# Altium PCB DAP_board.PcbDoc
Units mil, origin at the board's own origin, x right, y up, seen from the top; angles counter-clockwise.
Board outline 770 x 680 mil, 2 copper layers (Top Layer, Bottom Layer); 6 components, 20 nets, 62 pads, 34 vias.
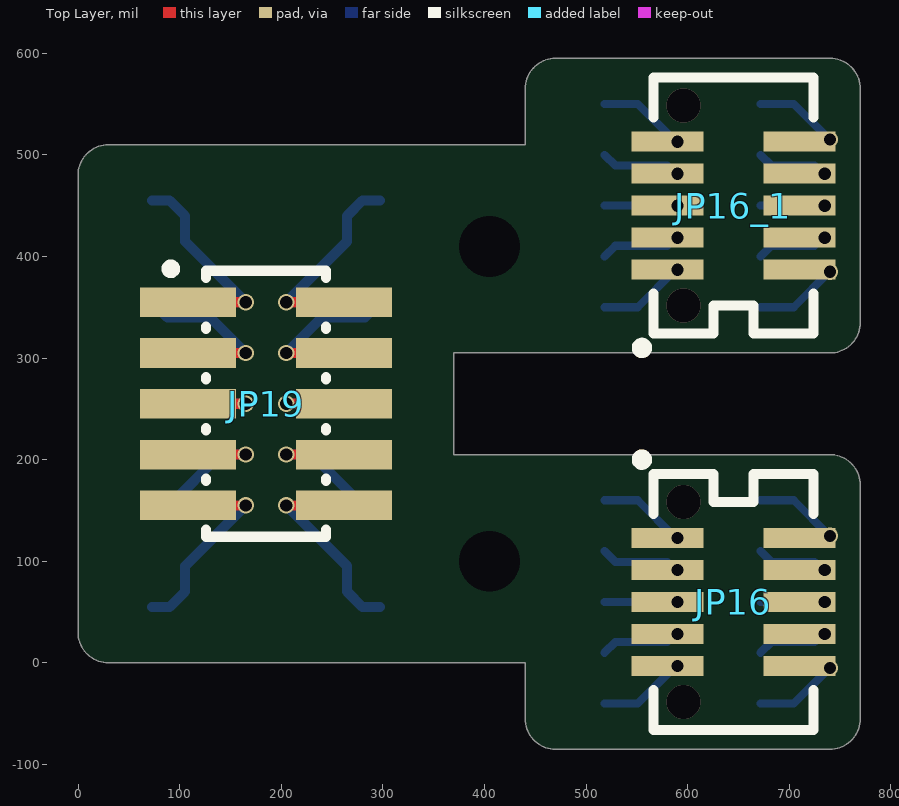
[diagram p0: Top Layer view]
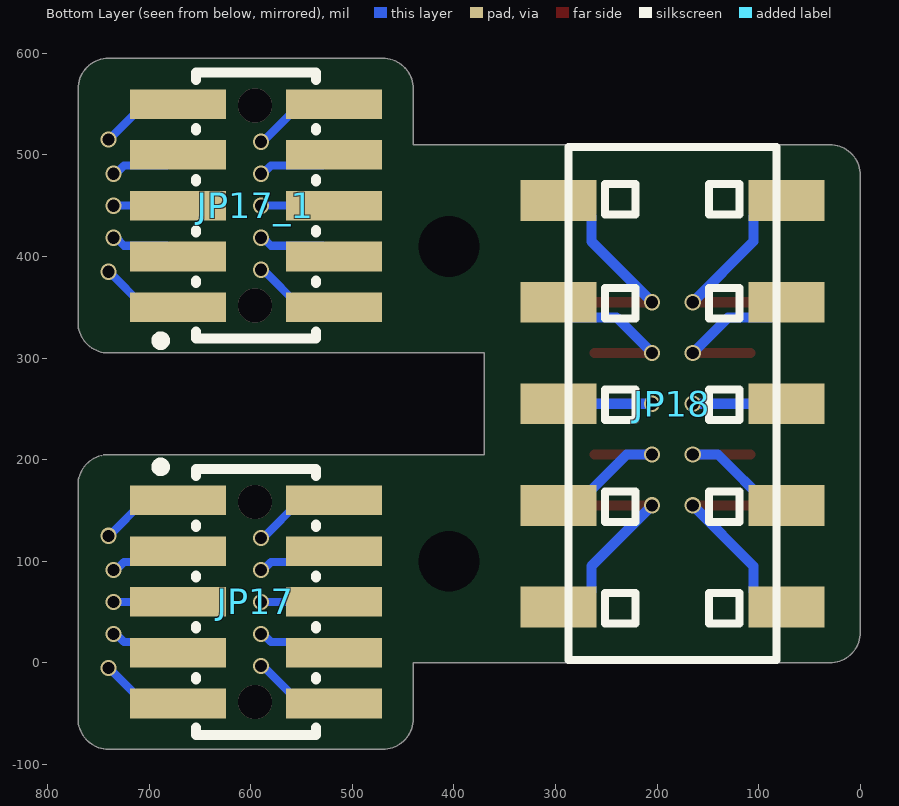
[diagram p1: Bottom Layer view, seen from below]

## Layer stack, top to bottom
Top Solder: solder mask 0.4, Solder Resist, Dk 3.5
Top Layer: signal copper 1.4
Dielectric 1: dielectric 12.6, FR-4, Dk 4.8
Bottom Layer: signal copper 1.4
Bottom Solder: solder mask 0.4, Solder Resist, Dk 3.5

## Board outline
30,0 cw(c30,30) 0,30 0,480 cw(c30,480) 30,510 440,510 440,565 cw(c470,565) 470,595 740,595 cw(c740,565) 770,565 770,335 cw(c740,335) 740,305 370,305 370,205 740,205 cw(c740,175) 770,175 770,-55 cw(c740,-55) 740,-85 470,-85 cw(c470,-55) 440,-55 440,0

## Design rules (kind name [scope] priority, off if disabled: settings)
Clearance [All] p1: gap=8 ignorepadtopadclearanceinfootprint=FALSE except(0: Arc-Hole Track-Hole SMDPad-Hole THPad-Hole Via-Hole Fill-Hole Poly-Hole Region-Hole Text-Hole)
PolygonConnect [All] p1: connectstyle=Relief reliefconductorwidth=10 reliefentries=4 polygonreliefangle="90 Angle" airgapwidth=10
RoutingVias [All] p1: holewidth=28 width=50 viastyle="Through Hole" minholewidth=28 minwidth=50 maxholewidth=28 maxwidth=50
SolderMaskExpansion [All] p1: expansion=4 istentingtop=FALSE
Width [All] p1: maxlimit=8 minlimit=8 preferedwidth=8
30 further rules are at their usual default settings.

## Components (designator, comment, footprint, x,y, rotation, side; value= is the part's Value field where it differs from the comment)
JP16 "Header 5*2" BTB-0.8MM-SMD-BM-2*5PIN#1 645,60 r0 top
JP16_1 "Header 5*2" BTB-0.8MM-SMD-BM-2*5PIN#2 645,450 r0 top (schematic designator JP16)
JP17 "Header 5X2" HDR1.27-M-LS-2x5P#1 595,60 r270 bottom
JP17_1 "Header 5X2" HDR1.27-M-LS-2x5P#2 595,450 r90 bottom (schematic designator JP17)
JP18 "Header 5X2" HDR2.54-M-LS-2x5P 185,255 r270 bottom
JP19 "Header 5X2" HDR1.27-M-LS-2x5P#1 185,255 r270 top

## Footprints (in the part's own frame and the unit in brackets; to place one, negate y for a bottom-side part, rotate by r counter-clockwise, add the part's x,y. Pads: shape width x height; smd on the part's side, far side on the other; paste and mask are expansions set on the pad)
BTB-0.8MM-SMD-BM-2*5PIN#1 [mm] "0.8侧插板对板公座，10PIN"
  rect 1.8x0.5 smd: 1(-1.65,1.6) 2(1.65,1.6) 3(-1.65,0.8) 4(1.65,0.8) 5(-1.65,0) 6(1.65,0) 7(-1.65,-0.8) 8(1.65,-0.8) 9(-1.65,-1.6) 10(1.65,-1.6)
  silkscreen extent -2.41,-3.2 2,3.68, body extent -2.16,-2.88 2.05,2.88, height 3.61
BTB-0.8MM-SMD-BM-2*5PIN#2 [mm] "0.8侧插板对板公座，10PIN"
  rect 1.8x0.5 smd: 1(-1.65,-1.6) 2(1.65,-1.6) 3(-1.65,-0.8) 4(1.65,-0.8) 5(-1.65,0) 6(1.65,0) 7(-1.65,0.8) 8(1.65,0.8) 9(-1.65,1.6) 10(1.65,1.6)
  silkscreen extent -2.41,-3.68 2,3.2, body extent -62.79,-2.87 -58.58,2.88, height 3.61
HDR1.27-M-LS-2x5P#1 [mm] "脚距：1.27mm，贴片双排母"
  rect 0.74x2.4 smd: 1(-2.54,-1.95) 2(-2.54,1.95) 3(-1.27,-1.95) 4(-1.27,1.95) 5(0,-1.95) 6(0,1.95) 7(1.27,-1.95) 8(1.27,1.95) 9(2.54,-1.95) 10(2.54,1.95)
  silkscreen extent -3.48,-2.49 3.33,1.5, body extent -3.18,-2.75 3.18,2.75, height 5.5
HDR1.27-M-LS-2x5P#2 [mm] "脚距：1.27mm，贴片双排母"
  rect 0.74x2.4 smd: 1(-2.54,1.95) 2(-2.54,-1.95) 3(-1.27,1.95) 4(-1.27,-1.95) 5(0,1.95) 6(0,-1.95) 7(1.27,1.95) 8(1.27,-1.95) 9(2.54,1.95) 10(2.54,-1.95)
  silkscreen extent -3.48,-1.5 3.33,2.49, body extent -3.18,-2.75 3.18,2.75, height 5.5
HDR2.54-M-LS-2x5P [mm] "脚距：2.54mm，贴片双排母"
  rect 1.02x1.9 smd: 1(-5.08,2.85) 2(-5.08,-2.85) 3(-2.54,2.85) 4(-2.54,-2.85) 5(0,2.85) 6(0,-2.85) 7(2.54,2.85) 8(2.54,-2.85) 9(5.08,2.85) 10(5.08,-2.85)
  silkscreen extent -6.42,-2.6 6.41,2.6, body extent -6.38,-3.2 6.38,3.2, height 5.15

## Part data
JP16 JP16_1: "BTB Connector"
JP17 JP17_1 JP18 JP19: "5*2P接插件", BOM名称=5*2P接插件, 学习资源=https://shop463601444.taobao.com, 版权归属="封装库来自淘宝 ID：黄晶宝石"

## Free pads (board coordinates)
  round 50 hole 60 unplated: 2(405,410) 2(405,100)

## Via types
v1: diameter 16, hole 12, Top Layer to Bottom Layer, tented both sides, 30 vias
v2: diameter 33.46, hole 33.46, Top Layer to Bottom Layer, 4 vias

## Nets (pads, with @x,y where several pads share a name; then routed paths per layer and width w, separated by ;. In a path a pad name is that pad's centre, name@x,y a point inside that pad or via, vN(x,y) a via of type N, cw(c..) or ccw(c..) an arc to the next point about the centre after c; other vN are vias at no path point)
NetJP16_1: 
NetJP16_2: 
NetJP16_3: 
NetJP16_4: 
NetJP16_5: 
NetJP16_6: 
NetJP16_7: 
NetJP16_8: 
NetJP16_9: 
NetJP16_10: 
NetJP18_1: JP18.1 JP19.1 | length 205.1
  Top Layer w10: JP19.1 v1(165,355)
  Bottom Layer w10: JP18.1 90.12,455 105.2,439.92 105.2,414.8 v1(165,355)
NetJP18_2: JP18.2 JP19.2 | length 205.1
  Top Layer w10: v1(205,355) JP19.2
  Bottom Layer w10: v1(205,355) 264.8,414.8 264.8,439.92 279.88,455 JP18.2
NetJP18_3: JP18.3 JP19.3 | length 169.7
  Top Layer w10: JP19.3 v1(165,305)
  Bottom Layer w10: JP18.3 87.87,339.92 130.08,339.92 v1(165,305)
NetJP18_4: JP18.4 JP19.4 | length 169.7
  Top Layer w10: v1(205,305) JP19.4
  Bottom Layer w10: v1(205,305) 239.92,339.92 282.13,339.92 JP18.4
NetJP18_5: JP18.5 JP19.5 | length 149
  Top Layer w10: JP19.5 v1(165,255)
  Bottom Layer w10: JP18.5 v1(165,255)
NetJP18_6: JP18.6 JP19.6 | length 149
  Top Layer w10: v1(205,255) JP19.6
  Bottom Layer w10: v1(205,255) JP18.6
NetJP18_7: JP18.7 JP19.7 | length 169.7
  Top Layer w10: JP19.7 v1(165,205)
  Bottom Layer w10: JP18.7 90.12,155 140.12,205 v1(165,205)
NetJP18_8: JP18.8 JP19.8 | length 169.8
  Top Layer w10: v1(205,205) JP19.8
  Bottom Layer w10: v1(205,205) 230,205 264.8,170.2 264.8,170.08 279.88,155 JP18.8
NetJP18_9: JP18.9 JP19.9 | length 205.1
  Top Layer w10: JP19.9 v1(165,155)
  Bottom Layer w10: JP18.9 90.12,55 105.2,70.08 105.2,95.2 v1(165,155)
NetJP18_10: JP18.10 JP19.10 | length 205.1
  Top Layer w10: v1(205,155) JP19.10
  Bottom Layer w10: v1(205,155) 264.8,95.2 264.8,70.08 279.88,55 JP18.10
pads on no net: JP16.1 JP16.2 JP16.3 JP16.4 JP16.5 JP16.6 JP16.7 JP16.8 JP16.9 JP16.10 JP16_1.1 JP16_1.2 JP16_1.3 JP16_1.4 JP16_1.5 JP16_1.6 JP16_1.7 JP16_1.8 JP16_1.9 JP16_1.10 JP17.1 JP17.2 JP17.3 JP17.4 JP17.5 JP17.6 JP17.7 JP17.8 JP17.9 JP17.10 JP17_1.1 JP17_1.2 JP17_1.3 JP17_1.4 JP17_1.5 JP17_1.6 JP17_1.7 JP17_1.8 JP17_1.9 JP17_1.10
copper on no net: | length 1551
  Bottom Layer w8: 518.22,-40 550.9,-40 587.91,-2.99 v1(590.04,-2.99) ; 518.22,10 528.79,20.57 579.94,20.57 587.87,28.5 v1(590.04,28.5) ; 518.22,60 v1(590.04,60) ; 518.22,110 528.79,99.43 579.94,99.43 587.87,91.5 v1(590.04,91.5) ; 518.22,160 550.9,160 587.91,122.99 v1(590.04,122.99) ; 518.22,350 550.9,350 587.91,387.01 v1(590.04,387.01) ; 518.22,400 528.79,410.57 579.94,410.57 587.87,418.5 v1(590.04,418.5) ; 518.22,450 v1(590.04,450) ; 518.22,500 528.79,489.43 579.94,489.43 587.87,481.5 v1(590.04,481.5) ; 518.22,550 550.9,550 587.91,512.99 v1(590.04,512.99) ; 671.78,-40 704.45,-40 739.45,-5 v1(740,-5) ; 671.78,10 682.34,20.57 724.9,20.57 732.84,28.5 v1(735,28.5) ; 671.78,60 v1(735,60) ; 671.78,110 682.34,99.43 724.9,99.43 732.84,91.5 v1(735,91.5) ; 671.78,160 704.45,160 739.45,125 v1(740,125) ; 671.78,350 704.45,350 739.45,385 v1(740,385) ; 671.78,400 682.34,410.57 724.9,410.57 732.84,418.5 v1(735,418.5) ; 671.78,450 v1(735,450) ; 671.78,500 682.34,489.43 724.9,489.43 732.84,481.5 v1(735,481.5) ; 671.78,550 704.45,550 739.45,515 v1(740,515)
  other v2: 595.79,-38.43 595.79,158.43 595.79,351.57 595.79,548.43

## Silkscreen, mask and mechanical layers (free items; w line width, h text height)
Mechanical 1:
  lines w10: 0,30 ccw(c30,30) 30,0 370,0 440,0 440,-55 ccw(c470,-55) 470,-85 740,-85 ccw(c740,-55) 770,-55 770,175 ccw(c740,175) 740,205 370,205 370,305 740,305 ccw(c740,335) 770,335 770,565 ccw(c740,565) 740,595 470,595 ccw(c470,565) 440,565 440,510 370,510 30,510 ccw(c30,480) 0,480 0,30